# Altium PCB stmProgrammer.PcbDoc
Units mil, origin at the board's own origin, x right, y up, seen from the top; angles counter-clockwise.
Board outline 3592.52 x 669.29 mil, 2 copper layers (Top Layer, Bottom Layer); 8 components, 8 nets, 35 pads, 3 vias.
Unrouted connection lines stored in the file: 1.
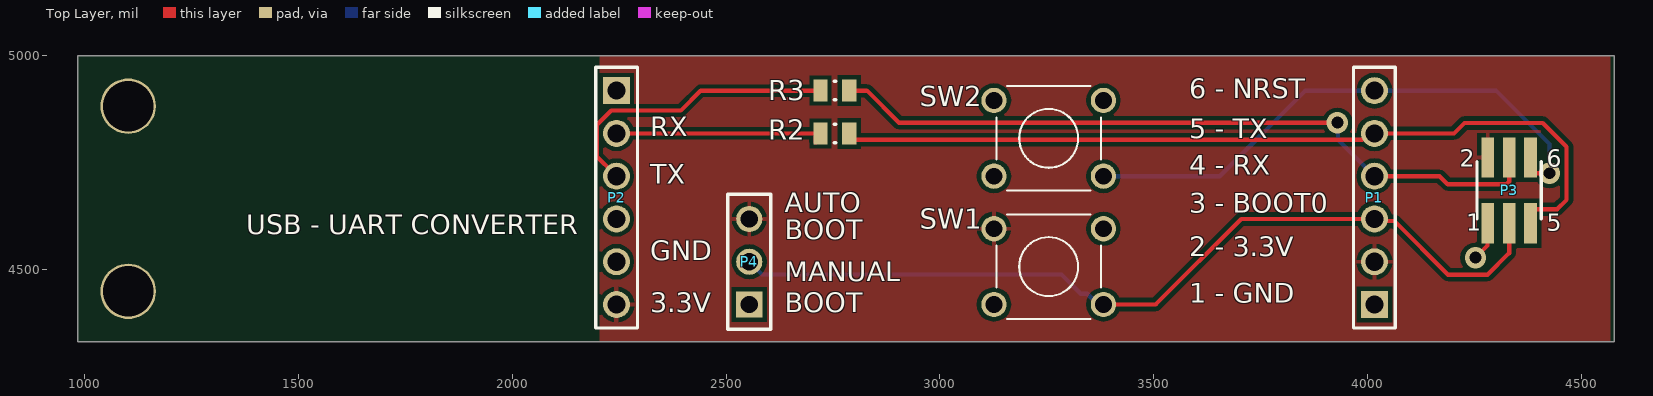
[diagram p0: Top Layer view]
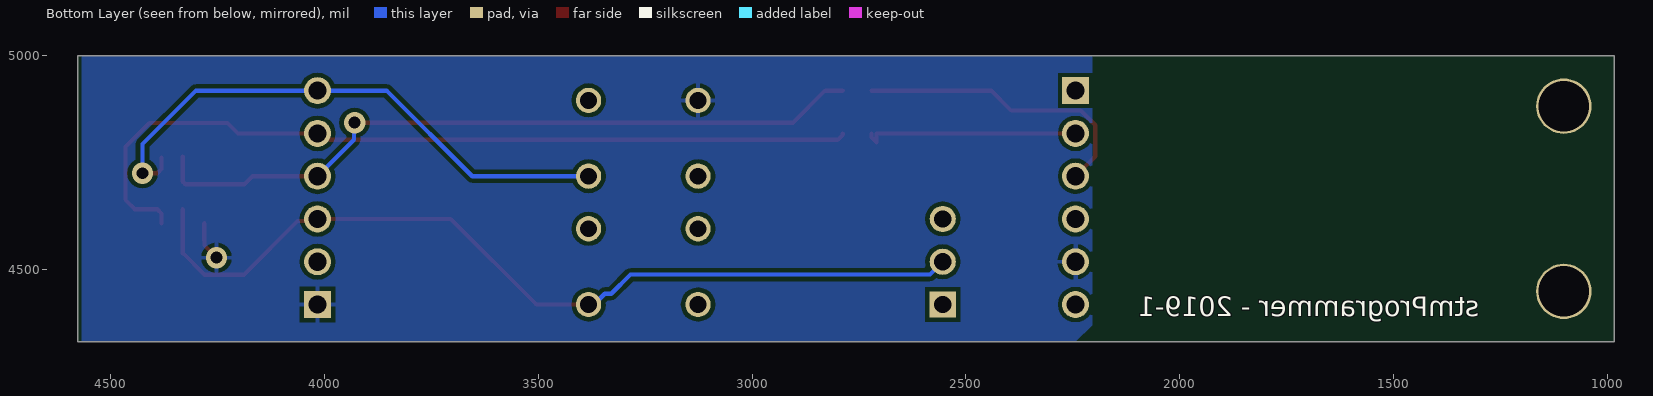
[diagram p1: Bottom Layer view, seen from below]
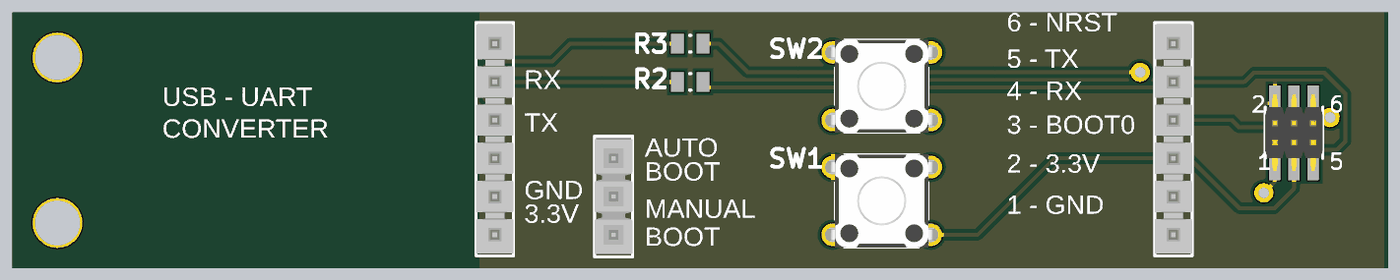
[diagram p2: 3D render of the assembled board from above, using the file's embedded part models]

## Layer stack, top to bottom
Top Solder: solder mask 0.4, Solder Resist, Dk 3.5
Top Layer: signal copper 1.4
Dielectric 1: dielectric 12.6, FR-4, Dk 4.8
Bottom Layer: signal copper 1.4
Bottom Solder: solder mask 0.4, Solder Resist, Dk 3.5

## Board outline
984.25,4330.71 4576.77,4330.71 4576.77,5000 984.25,5000

## Design rules (kind name [scope] priority, off if disabled: settings)
Clearance [All] p1: gap=10 ignorepadtopadclearanceinfootprint=FALSE except(0: Arc-Hole Track-Hole SMDPad-Hole THPad-Hole Via-Hole Fill-Hole Poly-Hole Region-Hole Text-Hole)
PolygonConnect [All] p1: connectstyle=Relief reliefconductorwidth=10 reliefentries=4 polygonreliefangle="90 Angle" airgapwidth=10
RoomDefinition main [InComponentClass('main')] p1: confinementstyle=ConfineIn formatcopy=TRUE lockcomponents=FALSE outline 7045,965 9380,965 9380,1705 7045,1705
RoutingVias [All] p1: holewidth=28 width=50 viastyle="Through Hole" minholewidth=28 minwidth=50 maxholewidth=28 maxwidth=50
SolderMaskExpansion [All] p1: expansion=4
Width [All] p1: maxlimit=10 minlimit=10 preferedwidth=10
30 further rules are at their usual default settings.

## Components (designator, comment, footprint, x,y, rotation, side; value= is the part's Value field where it differs from the comment)
P1 "PHT-106-01-L-S" SMTC-PHT-106-01-X-S 4015.87,4418.11 r90 top
P2 "PHT-106-01-L-S" SMTC-PHT-106-01-X-S 2244.09,4918.11 r270 top
P3 "62130621021" 62130621021 4330.71,4685.04 r0 top
P4 "TSW-103-07-F-S" SMTC-TSW-103-07-X-S 2554.33,4418.11 r90 top
R2 "0" RESC0805(2012)_L 2754.33,4818.11 r180 top value="10200.00 Ohm"
R3 "0" RESC0805(2012)_L 2754.33,4918.11 r180 top value="10200.00 Ohm"
SW1 "430156070736" 430156070736 3254.33,4506.69 r0 top
SW2 "430156070736" 430156070736 3254.33,4806.69 r0 top

## Footprints (in the part's own frame and the unit in brackets; to place one, negate y for a bottom-side part, rotate by r counter-clockwise, add the part's x,y. Pads: shape width x height; smd on the part's side, far side on the other; paste and mask are expansions set on the pad)
62130621021 [mm] "Pin Header, pitch 1.27 mm, SMD, Vertical, dual row, 6p"
  rect 0.75x2.4 smd: 1(-1.27,-1.95) 2(-1.27,1.95) 3(0,-1.95) 4(0,1.95) 5(1.27,-1.95) 6(1.27,1.95)
  silkscreen extent -1.91,-1.7 1.91,1.7, body extent -1.91,-2.55 1.9,2.55, height 5.9
430156070736 [mm] "6*6mm vertical type, THT, height 7.0mm, salmon actuator, 360gf, Bulk"
  round 1.5 hole 1: 1(-3.25,2.25) 2(-3.25,-2.25) 3(3.25,2.25) 4(3.25,-2.25)
  silkscreen extent -3.1,-3.1 3.1,3.1, body extent -3.95,-3.1 3.95,3.1, height 7.01
RESC0805(2012)_L [mm] "Chip Resistor, Body 2.0x1.3mm, IPC High Density"
  rect 0.85x1.3 smd: 1(-0.85,0) 2(0.85,0)
  silkscreen extent -0.05,-0.55 0.05,0.55, body extent -1.1,-0.67 1.1,0.68, height 0.7
SMTC-PHT-106-01-X-S [mm] "Press Fit Socket Assembly, 1x6 Pins, Vertical, 2.54mm Pitch, Male"
  rect 1.6x1.6 hole 1.081: 1(0,0)
  round 1.6 hole 1.081: 2(2.54,0) 3(5.08,0) 4(7.62,0) 5(10.16,0) 6(12.7,0)
  silkscreen extent -1.4,-1.24 14.1,1.24, body extent -1.26,-1.25 13.96,1.25, height 8.38
SMTC-TSW-103-07-X-S [mm] ".025 SQ Post Terminal Strip Assembly, 1x3 Pins, Vertical, 2.54mm Pitch, Male"
  rect 1.55x1.55 hole 1.02: 1(0,0)
  round 1.55 hole 1.02: 2(2.54,0) 3(5.08,0)
  silkscreen extent -1.46,-1.27 6.54,1.27, body extent -1.27,-1.27 6.35,1.27, height 8.38

## Part data
P1 P2: library part CMP-1024-00187-1, "Press Fit Header, Through-hole, Vertical, -55 to 125 degC, 2.54 mm Pitch, 6-Pin, Male, RoHS", Manufacturer=Samtec, Temperature Range="-55 to 125 degC", ComponentLink1Description="Manufacturer URL", ComponentLink1URL=http://www.samtec.com, ComponentLink2Description=Datasheet, ComponentLink2URL=http://www.samtec.com/documents/webfiles/pdf/pht.pdf, ComponentLink3Description="Package Specification", ComponentLink3URL=http://www.samtec.com/documents/webfiles/cpdf/PHT-1XX-XX-X-X-XXX-MKT.pdf, DatasheetVersion=F-214, Mounting Technology=Through-hole, Orientation=Vertical, PackageDescription=".100 Press Fit Socket Assembly", PackageReference=PHT-106-01-X-S, PackageVersion="J, 9/2009", PartNumber=PHT-106-01-L-S, Pitch="2.54 mm", RoHS=True
P3: library part CMP-1502-00936-1, "SMT Vertical Pin Header WR-PHD, Pitch 1.27 mm, Dual Row, 6 pins", Contact Resistance=20mOhm, Manufacturer="Wurth Elektronik", Operating Temperature=-40to105degC, Rated Current=1A, Withstanding Voltage=500VAC, Working Voltage=100VAC, Datasheet URL=https://katalog.we-online.de/em/datasheet/62130621021.pdf, Gender=Male, Manufacturer URL=http://www.we-online.de, Mounting Technology=SMT, Orientation=Vertical, Package Reference=62130621021, Packaging=TapeandReel, Part Number=62130621021, Pin Number=6, Pitch=1.27mm, Publisher=WurthElektronik, Row Number=Dual
P4: library part CMP-1024-00331-1, Manufacturer=Samtec, Temperature Range="-55 to 125 degC", ComponentLink1Description="Manufacturer URL", ComponentLink1URL=http://www.samtec.com, ComponentLink2Description=Datasheet, ComponentLink2URL=http://www.samtec.com/documents/webfiles/pdf/TSW_TH.PDF, ComponentLink3Description="Package Specification", ComponentLink3URL=http://www.samtec.com/documents/webfiles/cpdf/TSW-XXX-XX-XXX-X-XX-XXX-MKT.pdf, DatasheetVersion=F-214, Mounting Technology=Through-hole, Orientation=Vertical, PackageDescription=".025[0.64] SQ. Post Terminal Strip Assembly", PackageReference=TSW-103-07-X-S, PackageVersion="DM, 8/1988", PartNumber=TSW-103-07-F-S, Pitch="2.54 mm", RoHS=True
R2 R3: library part CMP-1013-00624-1, Case-EIA=0805, Case-Metric=2012, Power="0.125 W", Tolerance="1 %", Technology=SMT
SW1 SW2: library part CMP-1453-00006-1, "WS-TATV THT Tact Switch 6X6 mm", Manufacturer="Wuerth Elektronik", ComponentLink1Description="Manufacturer URL", ComponentLink1URL=http://www.we-online.com, ComponentLink2Description=Datasheet, ComponentLink2URL=http://katalog.we-online.de/em/datasheet/4301x6.pdf, NoPins=04, PackageReference=430156070736, PartNumber=430156070736

## Free pads (board coordinates)
  round 129.92 hole 118.11: 2(1102.36,4881.89) 3(1102.36,4448.82)

## Via types
v1: diameter 50, hole 28, Top Layer to Bottom Layer, 3 vias

## Nets (pads, with @x,y where several pads share a name; then routed paths per layer and width w, separated by ;. In a path a pad name is that pad's centre, name@x,y a point inside that pad or via, vN(x,y) a via of type N, cw(c..) or ccw(c..) an arc to the next point about the centre after c; other vN are vias at no path point)
BOOT0: P1.3 P3.3 P4.2 SW1.4 | length 2078.2
  Top Layer w10: SW1.4 3504.33,4418.11 3704.33,4618.11 P1.3 4020.86,4613.12 4062.36,4613.12 4187.92,4487.56 4280.08,4487.56 4330.71,4538.19 P3.3 P3.3@4330.71,4640.75
  Bottom Layer w10: P4.2 2584.25,4488.19 3284.25,4488.19 3329.33,4443.11 3344.31,4443.11 3369.31,4418.11 SW1.4
GND: P1.1 P2.5 P3.1 SW2.1 | length 92.6
  Top Layer w10: v1(4251.97,4527.56) 4280.25,4555.84 4280.25,4566.47 4280.71,4566.93 P3.1
NRST: P1.6 P3.6 SW2.4 | length 1320.8
  Top Layer w10: P3.6 4380.71,4734.76 4390.47,4725 v1(4425,4725)
  Bottom Layer w10: SW2.4 3654.33,4718.11 3854.33,4918.11 P1.6 4300,4918.11 4425,4793.11 v1(4425,4725)
RX: P1.4 P3.4 R3.1 | length 1728.8
  Top Layer w10: R3.1 2829.33,4918.11 2904.33,4843.11 v1(3929.33,4843.11) ; P1.4@4004.33,4718.11 P1.4 4168.06,4718.11 4186.99,4699.18 4324.85,4699.18 4330.71,4705.04 P3.4 P3.4@4330.71,4763.78
  Bottom Layer w10: v1(3929.33,4843.11) 3930.87,4841.57 3930.87,4803.11 P1.4
RXRECEIVER: P2.2 R2.2 | length 511.1
  Top Layer w10: P2.2 2709.13,4818.11 2709.13,4797.52 2720.87,4809.25 R2.2
TX: P1.5 P3.5 R2.1 | length 1969
  Top Layer w10: R2.1 2787.8,4814.84 2799.53,4803.11 3986.53,4803.11 4001.53,4818.11 4201.75,4818.11 4226.16,4842.52 4409.45,4842.52 4465,4786.97 4465,4662.79 4442.96,4640.75 4390.47,4640.75 4380.71,4630.98 P3.5
TXRECEIVER: P2.3 R3.2 | length 709.9
  Top Layer w10: 2242.28,4618.11 2254.33,4618.11 ; P2.3 2244.09,4722.6 2242.28,4724.41 2237.8,4724.41 2197.6,4764.61 2197.6,4837.37 2231.84,4871.61 2394.45,4871.61 2440.94,4918.11 R3.2
VCC: P1.2 P2.6 P3.2 P4.3 SW1.1
pads on no net: P2.1 P2.4 P4.1 SW1.2 SW1.3 SW2.2 SW2.3

## Polygon pours and split planes (outlines as drawn)
GND on Bottom Layer (solid, remove dead copper, pour order 0): 2204.72,5000 2204.72,4370.08 2244.09,4330.71 4566.93,4330.71 4566.93,5000
VCC on Top Layer (solid, remove dead copper, pour order 2): 4566.93,5000 4566.93,4330.71 2204.72,4330.71 2204.72,5000

## Silkscreen, mask and mechanical layers (free items; w line width, h text height)
Top Overlay:
  text "6 - NRST" at 3582.68,4885.04 h78.74
  text "RX" at 2322.83,4796.46 h78.74
  text "5 - TX" at 3582.68,4791.73 h78.74
  text "4 - RX" at 3582.68,4706.69 h78.74
  text "TX" at 2322.83,4685.04 h78.74
  text "AUTO" at 2637.8,4618.11 h78.74
  text "3 - BOOT0" at 3582.68,4617.32 h78.74
  text "USB - UART CONVERTER" at 1377.95,4566.93 h78.74
  text "BOOT" at 2637.8,4555.51 h78.74
  text "2 - 3.3V" at 3582.68,4516.14 h78.74
  text "GND" at 2322.83,4506.69 h78.74
  text "MANUAL" at 2637.8,4457.87 h78.74
  text "1 - GND" at 3582.68,4406.69 h78.74
  text "3.3V" at 2322.83,4384.65 h78.74
  text "BOOT" at 2637.8,4384.65 h78.74
Bottom Overlay:
  text "stmProgrammer - 2019-1" at 1300,4375 h78.74
Mechanical 2:
  lines w10: 984.25,4330.71 984.25,5000 2204.72,5000 4566.93,5000 4566.93,4330.71 984.25,4330.71

## Text inside footprints (layer, text, board x,y; h text height)
P3: Top Overlay "1" at 4230.91,4590.55 h40; Top Overlay "2" at 4215.16,4740.16 h40; Top Overlay "5" at 4418.7,4590.55 h40; Top Overlay "6" at 4418.7,4740.16 h40